# Altium PCB Metis 2023 (PCB) - Shasi - Copy.PcbDoc
Units mm, origin at the board's own origin, x right, y up, seen from the top; angles counter-clockwise.
Board outline 178.3 x 167.55 mm, 2 copper layers (Top Layer, Bottom Layer); 98 components, 39 nets, 291 pads, 9 vias.
Unrouted connection lines stored in the file: 16.
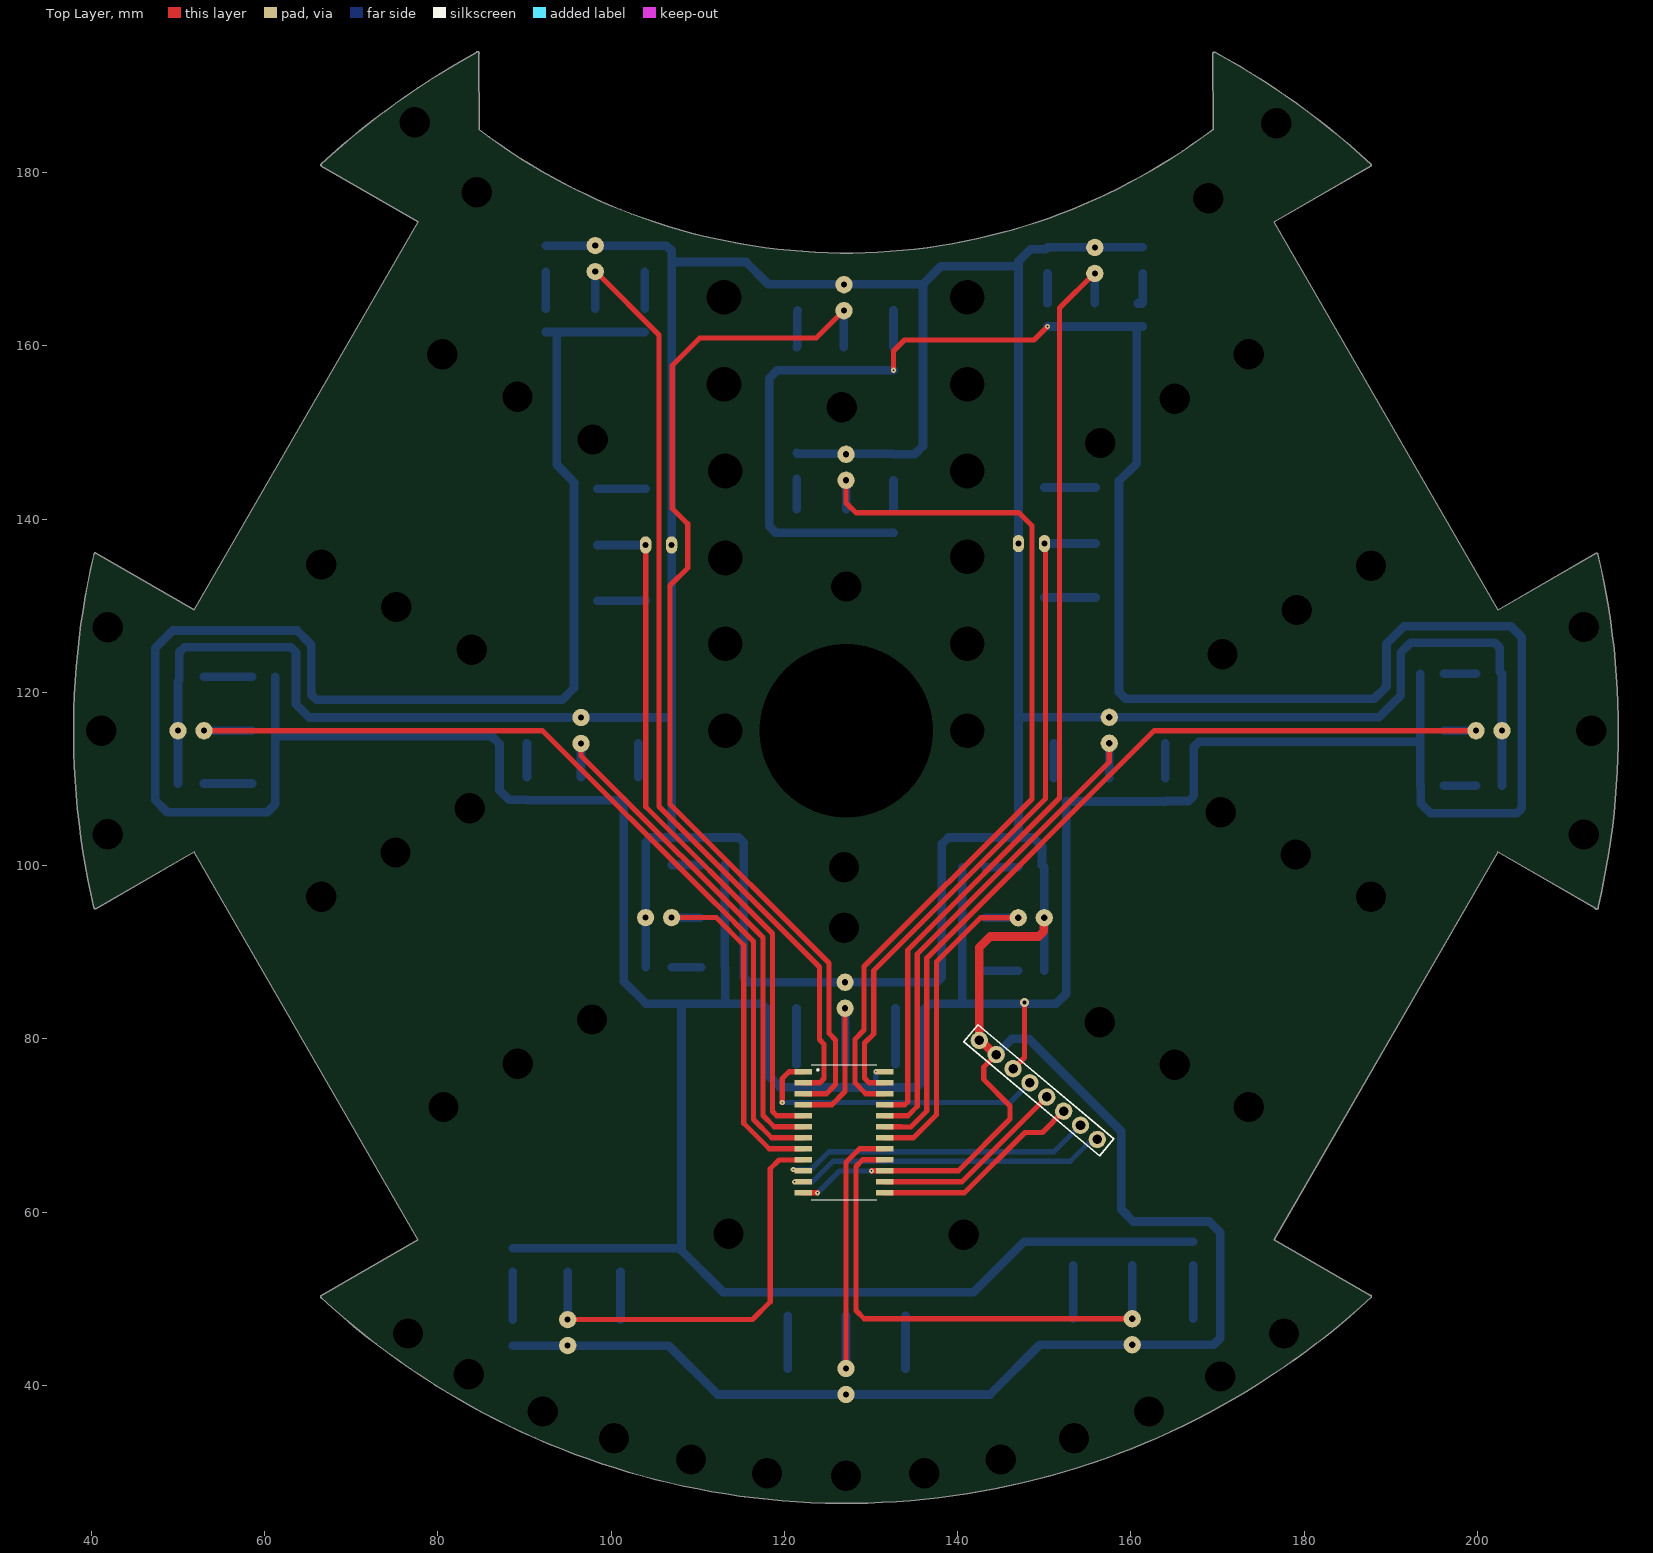
[diagram p0: Top Layer view]
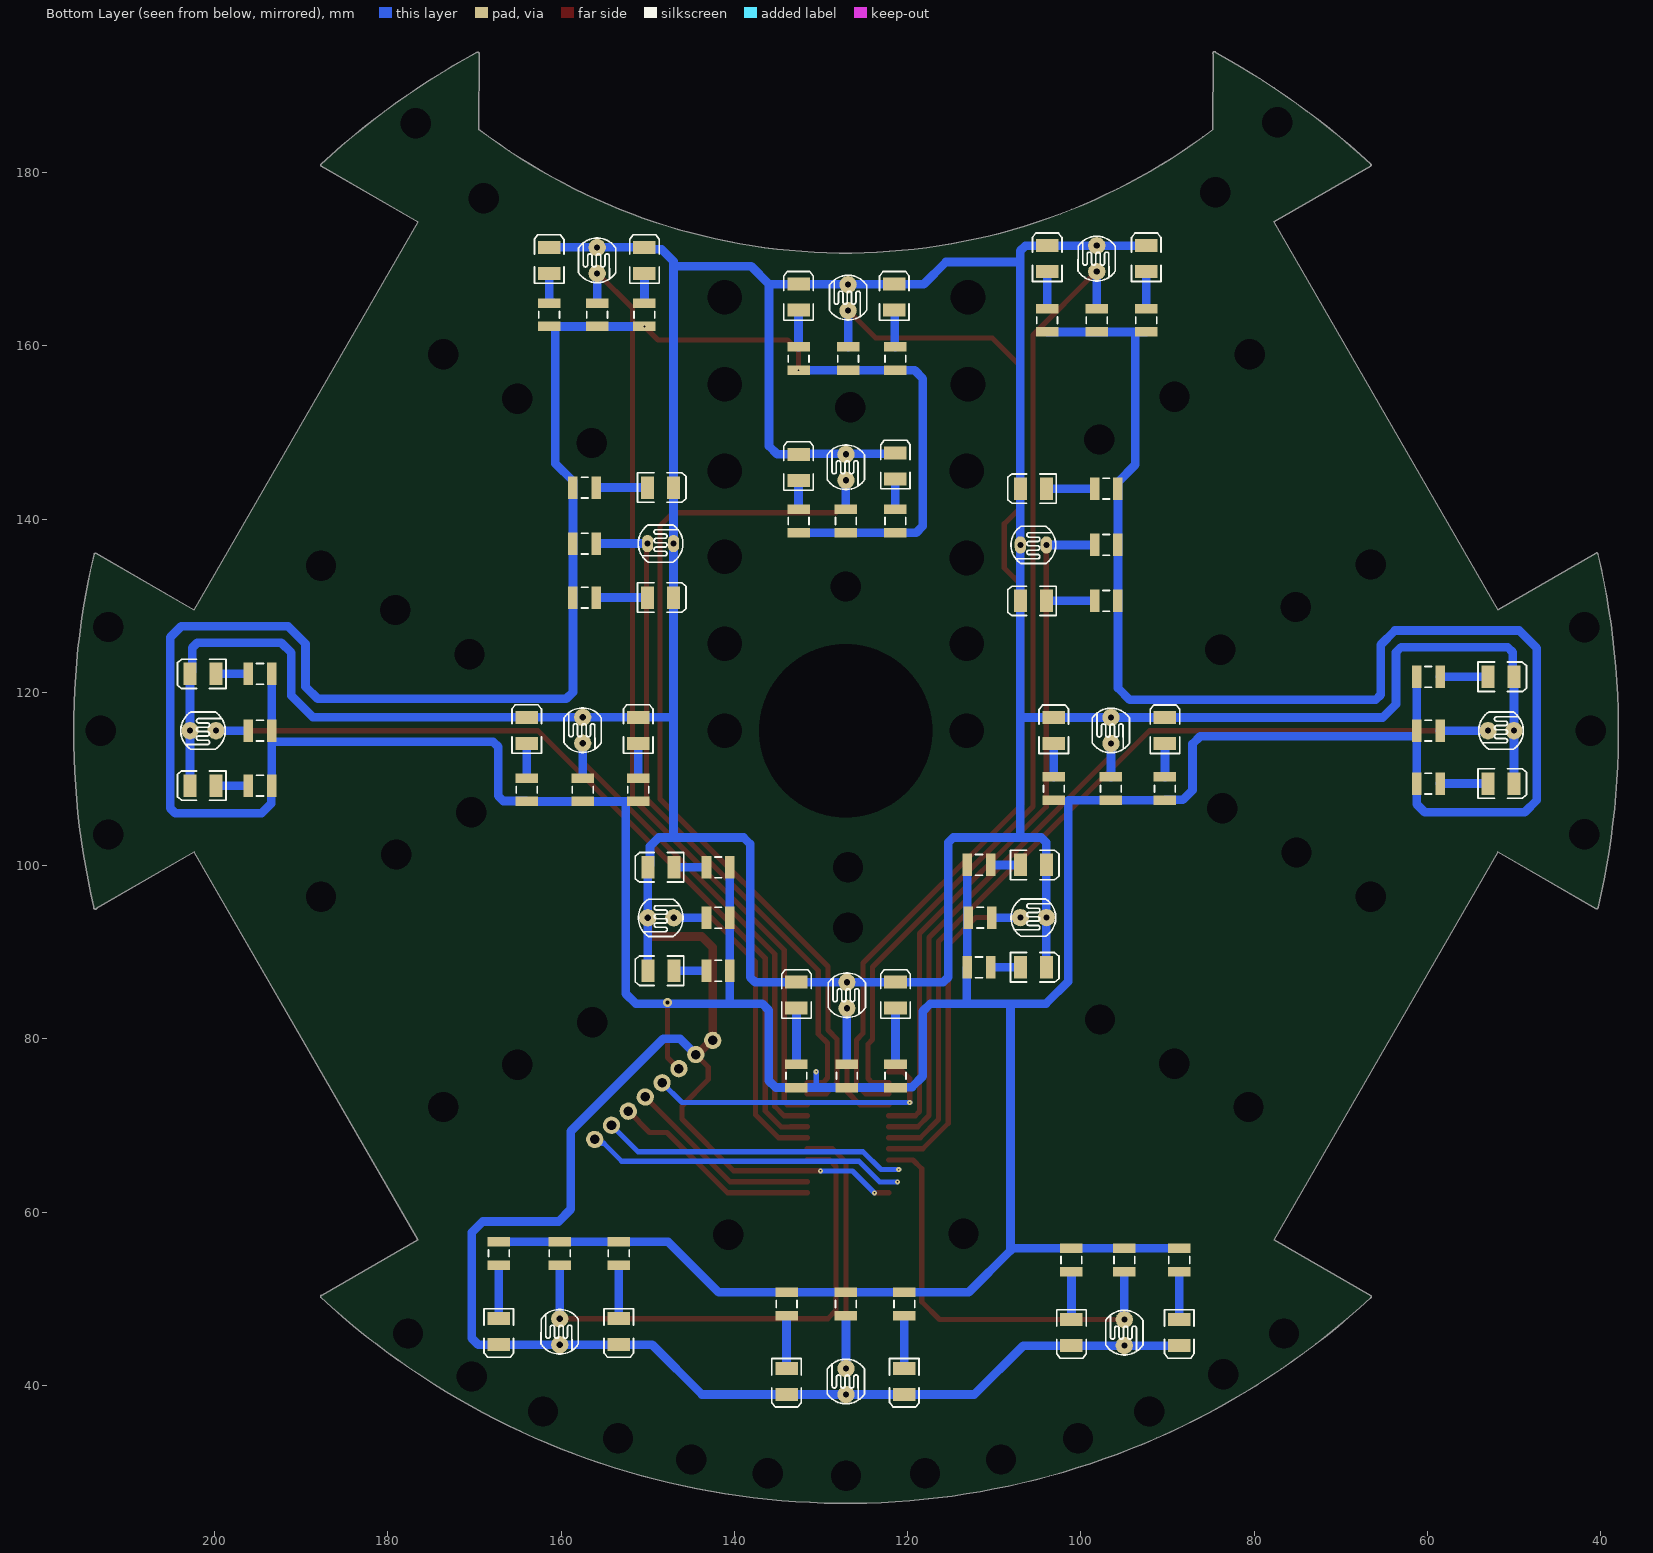
[diagram p1: Bottom Layer view, seen from below]
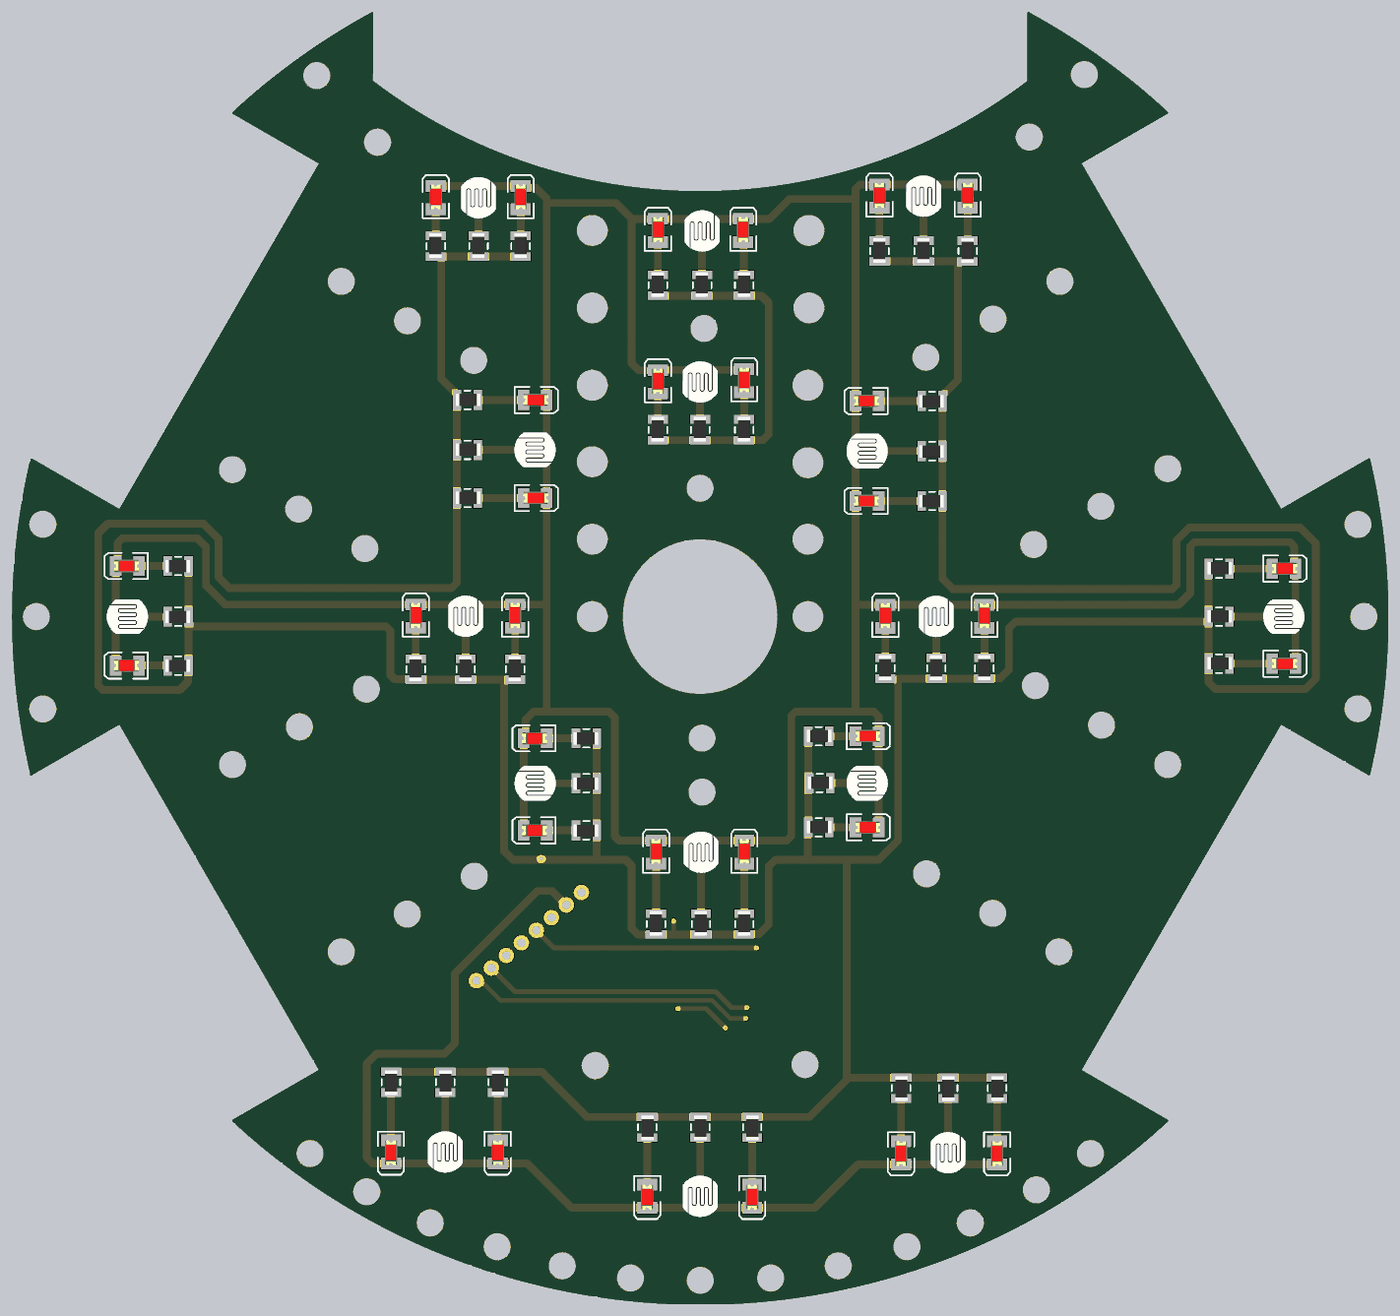
[diagram p2: 3D render of the assembled board from below, using the file's embedded part models]

## Layer stack, top to bottom
Top Solder: solder mask 0.0102, Solder Resist, Dk 3.5
Top Layer: signal copper 0.0356
Dielectric 1: dielectric 0.32, FR-4, Dk 4.8
Bottom Layer: signal copper 0.0356
Bottom Solder: solder mask 0.0102, Solder Resist, Dk 3.5

## Board outline
40.317,95.181 cw(c40.457,95.237) 40.31,95.202 cw(c127.107,115.55) 40.316,135.926 cw(c40.467,135.936) 40.542,136.067 51.866,129.529 77.715,174.3 66.6,180.718 cw(c66.675,180.848) 66.555,180.757 cw(c66.655,180.869) 66.553,180.98 cw(c127.107,115.55) 84.433,193.823 cw(c84.582,193.802) 84.726,193.846 cw(c84.611,193.749) 84.761,193.749 cw(c84.611,193.749) 84.733,193.661 84.757,184.958 ccw(c127.107,240.726) 169.516,185.003 cw(c169.603,184.888) 169.521,185.006 169.457,193.739 cw(c169.607,193.74) 169.663,193.88 cw(c169.634,193.732) 169.706,193.864 cw(c127.107,115.55) 187.682,180.96 cw(c187.58,180.849) 187.731,180.849 cw(c187.58,180.849) 187.641,180.712 cw(c187.55,180.831) 187.625,180.701 176.509,174.283 202.359,129.509 213.659,136.032 cw(c213.734,135.902) 213.818,136.027 cw(c213.751,135.892) 213.897,135.927 cw(c127.107,115.55) 216.257,115.55 cw(c127.107,115.55) 213.913,95.238 cw(c213.794,95.146) 213.944,95.146 cw(c213.794,95.146) 213.81,94.997 cw(c213.732,95.125) 213.585,95.093 202.352,101.578 176.518,56.832 187.601,50.433 cw(c187.526,50.303) 187.623,50.418 cw(c187.6,50.269) 187.751,50.269 cw(c187.6,50.269) 187.702,50.159 cw(c127.107,115.55) 66.583,50.093 cw(c66.618,50.239) 66.543,50.37 77.706,56.815 51.864,101.576 40.542,95.039 cw(c40.467,95.169)

## Design rules (kind name [scope] priority, off if disabled: settings)
Clearance [All] p1: gap=0.254 ignorepadtopadclearanceinfootprint=FALSE except(0: Arc-Hole Track-Hole SMDPad-Hole THPad-Hole Via-Hole Fill-Hole Poly-Hole Region-Hole Text-Hole; 0.1: Arc-Via Track-Via; 0.5: Arc-Arc Arc-Track Arc-SMDPad Arc-THPad Arc-Fill Arc-Poly Arc-Region Arc-Text Track-Track Track-SMDPad Track-THPad Track-Fill Track-Poly Track-Region Track-Text)
PolygonConnect [All] p1: connectstyle=Relief reliefconductorwidth=0.254 reliefentries=4 polygonreliefangle="90 Angle" airgapwidth=0.254
RoutingVias [All] p1: holewidth=0.711 width=1.27 viastyle="Through Hole" minholewidth=0.1 minwidth=0.1 maxholewidth=10 maxwidth=10
SolderMaskExpansion [All] p1: expansion=0.102 istentingtop=FALSE
Width [All] p1: maxlimit=10 minlimit=0.1 preferedwidth=0.254
30 further rules are at their usual default settings.

## Classes and differential pairs
component class "Metis 2023 (Schematic) - Shasi": R2 R4 R5 R6 R7 R9 R10 R11 R12 R13 R15 R16 R17 R18 R19 R20 R21 R22 R23 R24 R25 R26 R27 R28 R29 R30 R31 R32

## Components (designator, comment, footprint, x,y, rotation, side; value= is the part's Value field where it differs from the comment)
* "" "HEADER 8" 142.499,79.828 r320 top
LED1 "" MY_LED_SMD 88.646,46.101 r270 bottom
LED1 "" MY_LED_SMD 101.092,46.101 r270 bottom
LED2 "" MY_LED_SMD 133.97,40.462 r270 bottom
LED2 "" MY_LED_SMD 120.381,40.462 r270 bottom
LED3 "" MY_LED_SMD 167.178,46.204 r270 bottom
LED3 "" MY_LED_SMD 153.335,46.204 r270 bottom
LED4 "" MY_LED_SMD 201.319,122.132 r0 bottom
LED4 "" MY_LED_SMD 201.319,109.23 r0 bottom
LED5 "" MY_LED_SMD 150.368,169.85 r90 bottom
LED5 "" MY_LED_SMD 161.363,169.85 r90 bottom
LED6 "" MY_LED_SMD 121.539,165.608 r90 bottom
LED6 "" MY_LED_SMD 132.588,165.608 r90 bottom
LED7 "" MY_LED_SMD 103.886,170.053 r90 bottom
LED7 "" MY_LED_SMD 92.456,170.053 r90 bottom
LED8 "" MY_LED_SMD 51.511,121.788 r180 bottom
LED8 "" MY_LED_SMD 51.511,109.474 r180 bottom
LED9 "" MY_LED_SMD 121.397,85.041 r90 bottom
LED9 "" MY_LED_SMD 132.827,85.041 r90 bottom
LED10 "" MY_LED_SMD 151.089,115.621 r90 bottom
LED10 "" MY_LED_SMD 163.957,115.621 r90 bottom
LED11 "" MY_LED_SMD 148.512,130.937 r180 bottom
LED11 "" MY_LED_SMD 148.512,143.637 r180 bottom
LED12 "" MY_LED_SMD 105.486,100.076 r180 bottom
LED12 "" MY_LED_SMD 105.486,88.265 r180 bottom
LED13 "" MY_LED_SMD 105.488,130.556 r0 bottom
LED13 "" MY_LED_SMD 105.488,143.51 r0 bottom
LED14 "" MY_LED_SMD 148.487,99.807 r0 bottom
LED14 "" MY_LED_SMD 148.487,87.869 r0 bottom
LED15 "" MY_LED_SMD 121.412,146.134 r90 bottom
LED15 "" MY_LED_SMD 132.588,145.974 r90 bottom
LED16 "" MY_LED_SMD 103.124,115.594 r90 bottom
LED16 "" MY_LED_SMD 90.297,115.594 r90 bottom
R1 "" MY_RES_SMD_1206 88.646,54.483 r270 bottom
R1 "" MY_RES_SMD_1206 101.092,54.483 r270 bottom
R2 "" MY_RES_SMD_1206 59.897,115.57 r180 bottom
R3 "" MY_RES_SMD_1206 133.97,49.403 r270 bottom
R3 "" MY_RES_SMD_1206 120.381,49.403 r270 bottom
R4 "" MY_RES_SMD_1206 98.171,162.941 r90 bottom
R5 "" MY_RES_SMD_1206 167.178,55.245 r270 bottom
R5 "" MY_RES_SMD_1206 153.335,55.245 r270 bottom
R6 "" MY_RES_SMD_1206 126.868,158.511 r90 bottom
R7 "" MY_RES_SMD_1206 194.738,122.132 r0 bottom
R7 "" MY_RES_SMD_1206 194.738,109.23 r0 bottom
R8 "" MY_RES_SMD_1206 155.824,163.576 r90 bottom
R9 "" MY_RES_SMD_1206 150.368,163.576 r90 bottom
R9 "" MY_RES_SMD_1206 161.363,163.576 r90 bottom
R10 "" MY_RES_SMD_1206 194.738,115.57 r0 bottom
R11 "" MY_RES_SMD_1206 121.412,158.511 r90 bottom
R11 "" MY_RES_SMD_1206 132.588,158.511 r90 bottom
R12 "" MY_RES_SMD_1206 160.147,55.245 r270 bottom
R13 "" MY_RES_SMD_1206 103.886,162.941 r90 bottom
R13 "" MY_RES_SMD_1206 92.456,162.941 r90 bottom
R14 "" MY_RES_SMD_1206 127.112,49.403 r270 bottom
R15 "" MY_RES_SMD_1206 59.897,121.788 r180 bottom
R15 "" MY_RES_SMD_1206 59.897,109.474 r180 bottom
R16 "" MY_RES_SMD_1206 94.991,54.483 r270 bottom
R17 "" MY_RES_SMD_1206 121.397,75.739 r90 bottom
R17 "" MY_RES_SMD_1206 132.827,75.739 r90 bottom
R18 "" MY_RES_SMD_1206 127.122,139.78 r90 bottom
R19 "" MY_RES_SMD_1206 151.089,108.759 r90 bottom
R19 "" MY_RES_SMD_1206 163.957,108.759 r90 bottom
R20 "" MY_RES_SMD_1206 97.075,137.013 r0 bottom
R21 "" MY_RES_SMD_1206 157.273,130.937 r180 bottom
R21 "" MY_RES_SMD_1206 157.273,143.637 r180 bottom
R22 "" MY_RES_SMD_1206 96.53,108.886 r90 bottom
R23 "" MY_RES_SMD_1206 111.76,100.076 r180 bottom
R23 "" MY_RES_SMD_1206 111.76,88.265 r180 bottom
R24 "" MY_RES_SMD_1206 111.633,93.995 r180 bottom
R25 "" MY_RES_SMD_1206 97.075,130.556 r0 bottom
R25 "" MY_RES_SMD_1206 97.075,143.51 r0 bottom
R26 "" MY_RES_SMD_1206 127.01,75.739 r90 bottom
R27 "" MY_RES_SMD_1206 141.859,99.807 r0 bottom
R27 "" MY_RES_SMD_1206 141.859,87.869 r0 bottom
R28 "" MY_RES_SMD_1206 141.859,93.98 r0 bottom
R29 "" MY_RES_SMD_1206 121.412,139.78 r90 bottom
R29 "" MY_RES_SMD_1206 132.588,139.78 r90 bottom
R30 "" MY_RES_SMD_1206 157.495,108.759 r90 bottom
R31 "" MY_RES_SMD_1206 103.124,108.886 r90 bottom
R31 "" MY_RES_SMD_1206 90.297,108.886 r90 bottom
R32 "" MY_RES_SMD_1206 157.273,137.17 r180 bottom
U1 "" *SOIC-24_74HC4067(Primary) 126.873,69.215 r0 top locked
? "" PhotoCell#1 94.991,46.101 r90 bottom
? "" PhotoCell#1 127.112,40.462 r90 bottom
? "" PhotoCell#1 160.147,46.204 r90 bottom
? "" PhotoCell#1 201.319,115.57 r0 bottom
? "" PhotoCell#1 51.511,115.57 r180 bottom
? "" PhotoCell#1 96.53,115.594 r90 bottom
? "" PhotoCell#1 105.486,93.995 r180 bottom
? "" PhotoCell#1 127.01,85.041 r90 bottom
? "" PhotoCell#1 148.487,93.98 r0 bottom
? "" PhotoCell#1 157.495,115.621 r90 bottom
? "" PhotoCell#2 148.512,137.17 r180 bottom
? "" PhotoCell#2 105.488,137.013 r0 bottom
? "" PhotoCell#1 155.824,169.85 r90 bottom
? "" PhotoCell#1 127.122,145.974 r90 bottom
? "" PhotoCell#1 126.868,165.547 r90 bottom
? "" PhotoCell#1 98.171,170.053 r90 bottom

## Footprints (in the part's own frame and the unit in brackets; to place one, negate y for a bottom-side part, rotate by r counter-clockwise, add the part's x,y. Pads: shape width x height; smd on the part's side, far side on the other; paste and mask are expansions set on the pad)
*SOIC-24_74HC4067(Primary) [mm]
  rect 2x0.6 smd: P1(-4.7,7) P2(-4.7,5.73) P3(-4.7,4.46) P4(-4.7,3.19) P5(-4.7,1.92) P6(-4.7,0.65) P7(-4.7,-0.62) P8(-4.7,-1.89) P9(-4.7,-3.16) P10(-4.7,-4.43) P11(-4.7,-5.7) P12(-4.7,-6.97) P13(4.7,-6.97) P14(4.7,-5.7) P15(4.7,-4.43) P16(4.7,-3.16) P17(4.7,-1.89) P18(4.7,-0.62) P19(4.7,0.65) P20(4.7,1.92) P21(4.7,3.19) P22(4.7,4.46) P23(4.7,5.73) P24(4.7,7)
  silkscreen extent -3.8,-7.8 3.8,7.8
"HEADER 8" [mm]
  round 2 hole 1.1: 1(0,0) 2(2.54,0) 3(5.08,0) 4(7.62,0) 5(10.16,0) 6(12.7,0) 7(15.24,0) 8(17.78,0)
  silkscreen extent -1.27,-1.27 19.18,1.27
MY_LED_SMD [mm]
  rect 1.5x2.6 smd: 1(-1.5,0) 2(1.5,0)
  silkscreen extent -2.65,-1.7 2.95,1.7, body extent -1.51,-0.8 1.71,0.8, height 1.1
MY_RES_SMD_1206 [mm]
  rect 1.1x2.6 smd: 1(-1.35,0) 2(1.35,0)
  silkscreen extent -0.4,-1.2 0.4,1.2, body extent -1.52,-0.76 1.68,0.84, height 0.55
PhotoCell#1 [mm]
  round 2 hole 0.7: 1(-1.5,0) 2(1.5,0)
  silkscreen extent -2.58,-2.15 2.58,2.15, body extent -2.61,-2.16 2.61,2.14, height 2.44
PhotoCell#2 [mm]
  oval 1.3x2 hole 0.7: 1(-1.5,0) 2(1.5,0)
  silkscreen extent -2.58,-2.15 2.58,2.15, body extent -2.61,-2.16 2.61,2.14, height 2.44

## Part data
*: library part "Header 8"
LED1 LED1 LED2 LED2 LED3 LED3 LED4 LED4 LED5 LED5 LED6 LED6 LED7 LED7 LED8 LED8 LED9 LED9 LED10 LED10 LED11 LED11 LED12 LED12 LED13 LED13 LED14 LED14 LED15 LED15 LED16 LED16: library part "LED SMD"
R1 R1 R2 R3 R3 R4 R5 R5 R6 R7 R7 R8 R9 R9 R10 R11 R11 R12 R13 R13 R14 R15 R15 R16 R17 R17 R18 R19 R19 R20 R21 R21 R22 R23 R23 R24 R25 R25 R26 R27 R27 R28 R29 R29 R30 R31 R31 R32: library part "RES SMD 1206"
U1: library part 74HC4067, "Analog Switch/Analog Multiplexer Single 16:1 24-Pin SSOP T/R", Package=None, Availability="Not in stock", Check_prices=https://www.snapeda.com/parts/74HC4067/Nexperia/view-part/?ref=eda, MF=Nexperia, MP=74HC4067, Price=None, SnapEDA_Link=https://www.snapeda.com/parts/74HC4067/Nexperia/view-part/?ref=snap

## Free pads (board coordinates)
  round 0 hole 3.5: 1(76.556,45.995) 1(83.565,41.295) 1(92.127,37.005) 1(100.329,33.929) 1(109.226,31.449) 1(117.982,29.865) 1(127.106,29.57) 1(136.143,29.865) 1(144.986,31.449) 1(153.415,33.929) 1(162.085,37.005) 1(170.306,41.041) 1(177.656,45.995) 1(212.269,103.601) 1(212.269,127.539) 1(213.106,115.57) 3(41.148,115.57) 3(41.91,103.632) 3(41.91,127.508) 3(66.548,96.393) 3(66.548,134.747) 3(75.123,101.509) 3(75.22,129.856) 3(77.343,185.801) 3(80.518,159.004) 3(80.645,72.136) 3(83.698,106.625) 3(83.914,124.914) 3(84.482,177.706) 3(89.19,154.113) 3(89.22,77.125) 3(97.795,82.241) 3(97.884,149.171) 3(113.538,57.531) 3(126.619,152.908) 3(126.873,92.837) 3(126.873,99.822) 3(127.127,132.207) 3(140.716,57.404) 3(156.392,81.917) 3(156.459,148.772) 3(165.034,153.888) 3(165.064,77.027) 3(168.91,177.038) 3(170.362,106.174) 3(170.556,124.388) 3(173.609,72.136) 3(173.609,159.004) 3(176.784,185.674) 3(179.034,101.284) 3(179.131,129.504) 3(187.706,96.393) 3(187.706,134.62) 3(213.106,115.57)
  round 0 hole 4: 3(113.03,155.575) 3(113.03,165.608) 3(113.157,115.57) 3(113.157,125.603) 3(113.157,135.509) 3(113.157,145.542) 3(141.097,115.57) 3(141.097,125.603) 3(141.097,135.636) 3(141.097,145.542) 3(141.097,155.575) 3(141.097,165.608)
  round 0 hole 20: 3(127.127,115.57)

## Via types
v1: diameter 0.6, hole 0.2, Top Layer to Bottom Layer, 8 vias
v2: diameter 1, hole 0.5, Top Layer to Bottom Layer, 1 vias

## Nets (pads, with @x,y where several pads share a name; then routed paths per layer and width w, separated by ;. In a path a pad name is that pad's centre, name@x,y a point inside that pad or via, vN(x,y) a via of type N, cw(c..) or ccw(c..) an arc to the next point about the centre after c; other vN are vias at no path point)
ADD0: *.7 U1.P10 | length 35.3
  Bottom Layer w0.6: v1(121.015,64.913) 123.079,64.913 125.136,66.97 151.111,66.97 *.7
ADD1: *.8 U1.P11 | length 37
  Bottom Layer w0.6: v1(121.158,63.5) 123.222,63.5 125.592,65.87 152.992,65.87 155.077,67.955 155.296,67.955 155.74,68.399 *.8
ADD2: *.5 U1.P14 | length 22.8
  Top Layer w0.6: U1.P14 140.499,63.515 *.5
ADD3: *.6 U1.P13 | length 24.6
  Top Layer w0.6: U1.P13 140.785,62.245 147.755,69.215 149.778,69.215 *.6
GND: *.1 *.2 ?.1@94.991,44.601 ?.1@127.112,38.962 ?.1@160.147,44.704 ?.2@50.011,115.57 ?.2@96.53,117.094 ?.2@98.171,171.553 ?.2@103.986,93.995 ?.2@106.988,137.013 ?.2@126.868,167.047 ?.2@127.01,86.541 ?.2@127.122,147.474 ?.2@147.012,137.17 ?.2@149.987,93.98 ?.2@155.824,171.35 ?.2@157.495,117.121 ?.2@202.819,115.57 LED1.2 LED2.2 LED3.2 LED4.2 LED5.2 LED6.2 LED7.2 LED8.2 LED9.2 LED10.2 LED11.2 LED12.2 LED13.2 LED14.2 LED15.2 LED16.2 U1.P12 U1.P15 | length 704.4
  Top Layer w0.6: U1.P12 123.81,62.245 v1(123.825,62.23) ; v1(130.048,64.77) 130.063,64.785 U1.P15 140.096,64.785 146.05,70.739 146.05,72.263 143.002,75.311 143.002,76.753 *.2
  Top Layer w1: *.2 144.288,78.195 142.655,79.828 *.1 142.499,90.556 143.764,91.821 149.35,91.821 149.935,92.407 149.935,93.928 ?.2@149.987,93.98
  Bottom Layer w0.6: v1(123.825,62.23) 126.365,64.77 v1(130.048,64.77)
  Bottom Layer w1: LED8.2@50.011,109.474 50.011,121.285 50.165,121.439 50.165,124.636 50.751,125.222 63.041,125.222 63.627,124.636 63.627,118.618 65.151,117.094 90.297,117.094 96.53,117.094 103.124,117.094 106.988,117.094 ; LED1.2@88.646,44.601 94.991,44.601 101.092,44.601 106.656,44.601 112.295,38.962 120.381,38.962 133.97,38.962 143.737,38.962 149.479,44.704 153.335,44.704 160.147,44.704 167.178,44.704 169.545,44.704 170.307,45.466 170.307,57.658 169.037,58.928 160.274,58.928 158.877,60.325 158.877,69.342 148.209,80.01 146.259,80.01 *.2 ; LED7.2@92.456,171.553 98.171,171.553 103.886,171.553 106.402,171.553 106.988,170.967 106.988,169.672 ; LED12.2@103.986,88.265 103.986,102.665 104.572,103.251 106.988,103.251 ; LED15.2@121.412,147.634 121.492,147.554 132.508,147.554 132.588,147.474 135.028,147.474 135.993,148.439 135.993,167.108 ; 147.012,103.251 147.012,117.35 ; LED14.2@149.987,87.869 149.987,99.807 149.737,100.057 149.737,102.231 148.717,103.251 138.938,103.251 138.176,102.489 138.176,87.127 137.59,86.541 127.01,86.541 121.397,86.541 115.902,86.541 115.316,87.127 115.316,102.665 114.73,103.251 106.988,103.251 ; LED5.2@161.363,171.35 155.824,171.35 150.368,171.35 150.158,171.14 148.407,171.14 147.012,169.745 147.012,169.164 ; LED4.2@202.819,109.23 202.819,122.132 202.569,122.382 202.569,125.144 201.983,125.73 192.278,125.73 191.135,124.587 191.135,119.634 188.622,117.121 163.957,117.121 157.495,117.121 151.089,117.121 147.241,117.121 147.012,117.35 ; 106.988,103.251 106.988,117.094 ; 106.988,117.094 106.988,130.556 106.988,137.013 106.988,143.51 106.988,169.672 ; 106.988,169.672 115.57,169.672 118.134,167.108 121.539,167.108 132.588,167.108 135.993,167.108 ; 135.993,167.108 138.049,169.164 147.012,169.164 ; 147.012,117.35 147.012,130.937 147.012,143.637 147.012,169.164
NetLED1_1: LED1.1 R1.2 | length 11.1
  Bottom Layer w1: LED1.1@88.646,47.601 R1.2@88.646,53.133 ; LED1.1@101.092,47.601 R1.2@101.092,53.133
NetLED2_1: LED2.1 R3.2 | length 12.2
  Bottom Layer w1: LED2.1@120.381,41.962 R3.2@120.381,48.053 ; LED2.1@133.97,41.962 R3.2@133.97,48.053
NetLED3_1: LED3.1 R5.2 | length 12.4
  Bottom Layer w1: LED3.1@153.335,47.704 R5.2@153.335,53.895 ; LED3.1@167.178,47.704 R5.2@167.178,53.895
NetLED4_1: LED4.1 R7.2 | length 7.5
  Bottom Layer w1: R7.2@196.088,109.23 LED4.1@199.819,109.23 ; R7.2@196.088,122.132 LED4.1@199.819,122.132
NetLED5_1: LED5.1 R9.2 | length 8
  Bottom Layer w1: R9.2@150.368,164.926 LED5.1@150.368,168.35 ; R9.2@161.363,164.926 R9.2@161.313,164.926 ; LED5.1@161.363,168.35 161.363,164.976 R9.2@161.313,164.926 ; R9.2@161.313,164.926 161.263,164.876 160.782,164.876 160.832,164.926 R9.2@161.313,164.926
NetLED6_1: LED6.1 R11.2 | length 8.6
  Bottom Layer w1: R11.2@121.412,159.861 121.426,159.861 121.476,159.911 121.476,164.045 LED6.1@121.539,164.108 ; R11.2@132.588,159.861 LED6.1@132.588,164.108
NetLED7_1: LED7.1 R13.2 | length 8.5
  Bottom Layer w1: R13.2@92.456,164.291 LED7.1@92.456,168.553 ; R13.2@103.886,164.291 LED7.1@103.886,168.553
NetLED8_1: LED8.1 R15.2 | length 11.1
  Bottom Layer w1: LED8.1@53.011,109.474 R15.2@58.547,109.474 ; LED8.1@53.011,121.788 R15.2@58.547,121.788
NetLED9_1: LED9.1 R17.2 | length 12.9
  Bottom Layer w1: R17.2@121.397,77.089 LED9.1@121.397,83.541 ; R17.2@132.827,77.089 LED9.1@132.827,83.541
NetLED10_1: LED10.1 R19.2 | length 8
  Bottom Layer w1: R19.2@151.089,110.109 LED10.1@151.089,114.121 ; R19.2@163.957,110.109 LED10.1@163.957,114.121
NetLED11_1: LED11.1 R21.2 | length 11.8
  Bottom Layer w1: LED11.1@150.012,130.937 R21.2@155.923,130.937 ; LED11.1@150.012,143.637 R21.2@155.923,143.637
NetLED12_1: LED12.1 R23.2 | length 6.8
  Bottom Layer w1: LED12.1@106.986,88.265 R23.2@110.41,88.265 ; LED12.1@106.986,100.076 R23.2@110.41,100.076
NetLED13_1: LED13.1 R25.2 | length 11.1
  Bottom Layer w1: R25.2@98.425,130.556 LED13.1@103.988,130.556 ; R25.2@98.425,143.51 LED13.1@103.988,143.51
NetLED14_1: LED14.1 R27.2 | length 7.6
  Bottom Layer w1: R27.2@143.209,87.869 LED14.1@146.987,87.869 ; R27.2@143.209,99.807 LED14.1@146.987,99.807
NetLED15_1: LED15.1 R29.2 | length 6.8
  Bottom Layer w1: R29.2@121.412,141.13 LED15.1@121.412,144.634 ; R29.2@132.588,141.13 LED15.1@132.588,144.474
NetLED16_1: LED16.1 R31.2 | length 7.7
  Bottom Layer w1: R31.2@90.297,110.236 LED16.1@90.297,114.094 ; R31.2@103.124,110.236 LED16.1@103.124,114.094
Out: *.4 U1.P1 | length 35
  Top Layer w0.6: v1(119.761,72.644) 119.761,75.438 120.538,76.215 U1.P1
  Bottom Layer w0.6: v1(119.761,72.644) 146.05,72.644 *.4
S0: ?.2@94.991,47.601 R16.2 U1.P9 | length 49.3
  Top Layer w0.6: ?.2@94.991,47.601 116.308,47.601 118.364,49.657 118.364,65.024 119.365,66.025 U1.P9@122.173,66.025
  Bottom Layer w1: ?.2@94.991,47.601 R16.2
S1: ?.1@106.986,93.995 R24.2 U1.P8 | length 41.6
  Top Layer w0.6: ?.1@106.986,93.995 112.126,93.995 115.318,90.803 115.318,70.261 118.254,67.325 U1.P8
  Bottom Layer w1: ?.1@106.986,93.995 R24.2
S2: ?.1@53.011,115.57 R2.2 U1.P7 | length 106.2
  Top Layer w0.6: ?.1@53.011,115.57 92.075,115.57 111.977,95.668 112.008,95.668 116.418,91.259 116.418,70.717 118.54,68.595 U1.P7
  Bottom Layer w1: ?.1@53.011,115.57 R2.2
S3: ?.1@96.53,114.094 R22.2 U1.P6 | length 60.7
  Top Layer w0.6: ?.1@96.53,114.094 96.53,112.671 108.023,101.178 108.055,101.178 117.518,91.714 117.518,71.172 118.825,69.865 U1.P6
  Bottom Layer w1: R22.2 ?.1@96.53,114.094
S4: ?.1@103.988,137.013 R20.2 U1.P5 | length 80.8
  Top Layer w0.6: ?.1@103.988,137.013 103.988,106.8 118.618,92.17 118.618,71.628 119.111,71.135 U1.P5
  Bottom Layer w1: R20.2 ?.1@103.988,137.013
S5: ?.1@127.01,83.541 R26.2 U1.P4 | length 21.5
  Top Layer w0.6: U1.P4 125.491,72.405 127.01,73.924 ?.1@127.01,83.541
  Bottom Layer w1: R26.2 ?.1@127.01,83.541
S6: ?.1@126.868,164.047 R6.2 U1.P3 | length 123.3
  Top Layer w0.6: U1.P3 124.856,73.675 125.91,74.729 125.91,79.869 125.134,80.645 125.134,88.765 106.807,107.092 106.807,132.334 108.839,134.366 108.839,139.446 107.061,141.224 107.061,157.734 110.236,160.909 123.666,160.909 126.805,164.047 ?.1@126.868,164.047
  Bottom Layer w1: R6.2 ?.1@126.868,164.047
S7: ?.1@98.171,168.553 R4.2 U1.P2 | length 111
  Top Layer w0.6: ?.1@98.171,168.553 98.234,168.553 105.537,161.251 105.537,106.807 124.034,88.31 124.034,79.928 124.587,79.375 124.587,75.438 124.094,74.945 U1.P2
  Bottom Layer w1: R4.2 ?.1@98.171,168.553
S8: ?.1@150.012,137.17 R32.2 U1.P23 | length 78.9
  Top Layer w0.6: U1.P23 129.779,74.945 129.243,75.481 129.243,79.513 130.302,80.572 130.302,87.884 150.14,107.722 150.14,137.042 ?.1@150.012,137.17
  Bottom Layer w1: ?.1@150.012,137.17 R32.2
S9: ?.1@127.122,144.474 R18.2 U1.P22 | length 105.2
  Top Layer w0.6: ?.1@127.122,144.474 127.122,141.864 128.27,140.716 147.066,140.716 148.562,139.22 148.562,107.699 129.202,88.339 129.202,81.027 128.143,79.968 128.143,74.93 129.398,73.675 U1.P22
  Bottom Layer w1: R18.2 ?.1@127.122,144.474
S10: ?.1@155.824,168.35 R8.2 U1.P21 | length 110.8
  Top Layer w0.6: U1.P21 133.888,72.405 134.239,72.756 134.239,90.265 151.765,107.791 151.765,164.355 155.761,168.35 ?.1@155.824,168.35
  Bottom Layer w1: R8.2 ?.1@155.824,168.35
S11: ?.1@157.495,114.121 R30.2 U1.P20 | length 59.3
  Top Layer w0.6: U1.P20 134.254,71.135 135.339,72.22 135.339,89.809 157.495,111.965 ?.1@157.495,114.121
  Bottom Layer w1: R30.2 ?.1@157.495,114.121
S12: ?.1@199.819,115.57 R10.2 U1.P19 | length 101.3
  Top Layer w0.6: U1.P19 133.503,69.865 133.518,69.85 134.588,69.85 136.439,71.701 136.439,89.354 162.655,115.57 ?.1@199.819,115.57
  Bottom Layer w1: R10.2 ?.1@199.819,115.57
S13: ?.1@146.987,93.98 R28.2 U1.P18 | length 40
  Top Layer w0.6: U1.P18 134.889,68.595 137.539,71.245 137.539,88.898 142.621,93.98 ?.1@146.987,93.98
  Bottom Layer w1: R28.2 ?.1@146.987,93.98
S14: ?.2@127.112,41.962 R14.2 U1.P17 | length 35
  Top Layer w0.6: ?.2@127.112,41.962 127.112,65.771 128.666,67.325 U1.P17
  Bottom Layer w1: ?.2@127.112,41.962 R14.2
S15: ?.2@160.147,47.704 R12.2 U1.P16 | length 58.7
  Top Layer w0.6: U1.P16 129.047,66.055 128.27,65.278 128.27,48.641 129.207,47.704 ?.2@160.147,47.704
  Bottom Layer w1: ?.2@160.147,47.704 R12.2
VCC: *.3 R1.1 R2.1 R3.1 R4.1 R5.1 R6.1 R7.1 R8.1 R9.1 R10.1 R11.1 R12.1 R13.1 R14.1 R15.1 R16.1 R17.1 R18.1 R19.1 R20.1 R21.1 R22.1 R23.1 R24.1 R25.1 R26.1 R27.1 R28.1 R29.1 R30.1 R31.1 R32.1 U1.P24 | length 739
  Top Layer w0.6: v1(132.588,157.161) 132.588,159.385 133.858,160.655 148.797,160.655 v1(150.368,162.226)
  Top Layer w0.61: *.3 147.701,77.873 v2(147.701,84.201)
  Bottom Layer w0.61: 130.556,74.389 v1(130.556,76.2)
  Bottom Layer w1: R15.1@61.247,121.788 R2.1 R2.1@61.247,114.935 ; R1.1@88.646,55.833 R16.1 101.092,55.833 107.87,55.833 108.124,55.579 ; R13.1@92.456,161.591 R4.1 R13.1@103.886,161.591 ; R13.1@93.726,161.591 93.726,146.259 95.725,144.26 95.725,143.51 R20.1 95.725,130.556 95.725,120.49 94.361,119.126 65.991,119.126 65.405,119.712 65.405,125.476 63.754,127.127 49.403,127.127 47.371,125.095 47.371,107.569 48.768,106.172 60.325,106.172 61.247,107.094 61.247,109.474 R2.1@61.247,114.935 ; R23.1@113.11,100.076 113.11,88.265 113.16,88.215 113.16,84.077 113.157,84.074 ; R29.1@132.588,138.43 R18.1 121.412,138.43 118.999,138.43 118.237,139.192 118.237,156.21 119.188,157.161 121.412,157.161 R6.1 v1(132.588,157.161) ; R27.1@140.509,99.807 R28.1 140.509,87.869 140.509,84.121 140.462,84.074 ; v1(150.368,162.226) R9.1@160.705,162.226 ; R9.1@161.363,162.226 R9.1@160.705,162.226 ; R5.1@167.178,56.595 R12.1 153.335,56.595 147.654,56.595 141.812,50.753 133.97,50.753 R14.1 120.381,50.753 112.95,50.753 108.124,55.579 ; R7.1@193.388,122.132 R10.1 R10.1@193.388,114.3 ; R2.1@61.247,114.935 86.233,114.935 87.122,114.046 87.122,108.712 88.248,107.586 90.247,107.586 90.297,107.536 R22.1 101.473,107.536 101.473,86.614 104.013,84.074 108.077,84.074 ; 108.077,84.074 113.157,84.074 ; 108.077,84.074 108.124,84.027 108.124,55.579 ; 113.157,84.074 117.348,84.074 118.237,83.185 118.237,75.692 119.49,74.439 121.347,74.439 121.397,74.389 R26.1 130.556,74.389 132.827,74.389 135.222,74.389 136.017,75.184 136.017,83.312 136.779,84.074 140.462,84.074 ; 140.462,84.074 151.384,84.074 152.527,85.217 152.527,107.409 R30.1 163.957,107.409 164.007,107.459 166.673,107.459 167.259,108.045 167.259,113.714 167.845,114.3 R10.1@193.388,114.3 ; R9.1@160.705,162.226 160.655,162.176 160.655,146.419 158.623,144.387 158.623,143.637 R32.1 158.623,130.937 158.623,120.015 159.385,119.253 188.087,119.253 189.484,120.65 189.484,125.603 191.516,127.635 203.835,127.635 205.105,126.365 205.105,106.631 204.519,106.045 194.564,106.045 193.438,107.171 193.438,109.18 193.388,109.23 R10.1@193.388,114.3

## Silkscreen, mask and mechanical layers (free items; w line width, h text height)
Mechanical 1:
  circle w0.3: c127.107,115.55 r10
  lines w0.3: 40.456,95.237 cw(c127.107,115.55) 40.465,135.901 ; 40.467,95.169 51.919,101.781 77.912,56.76 66.618,50.239 ; 40.467,135.936 51.921,129.323 77.92,174.355 66.675,180.848 ; 66.635,50.249 ccw(c127.107,115.55) 187.6,50.269 ; 66.655,180.869 cw(c127.107,115.55) 84.611,193.749 ; 84.582,193.802 84.607,184.883 ccw(c127.107,240.726) 169.607,184.883 ; 169.607,193.74 169.672,184.912 ; 169.634,193.732 cw(c127.107,115.55) 187.58,180.849 ; 187.526,50.303 176.312,56.777 202.297,101.784 213.794,95.146 ; 187.55,180.831 176.303,174.338 202.304,129.303 213.734,135.902 ; 213.732,95.125 ccw(c127.107,115.55) 213.751,135.892